# Altium PCB PCB1.PcbDoc
Units mm, origin at the board's own origin, x right, y up, seen from the top; angles counter-clockwise.
Board outline 319 x 41.5 mm, 4 copper layers (Top Layer, Mid Layer 1, Mid Layer 2, Bottom Layer), stack 1.57 mm thick; 48 components, 54 nets, 298 pads, 180 vias.
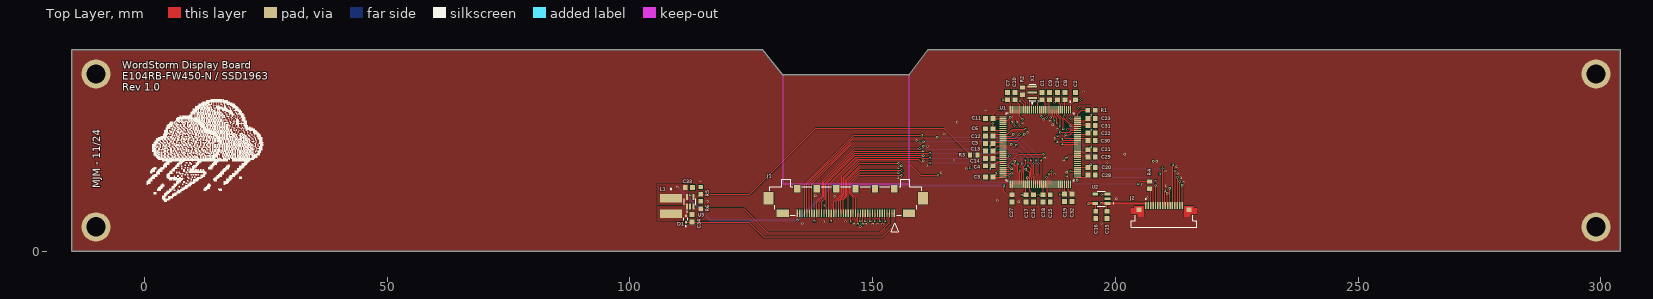
[diagram p0: Top Layer view]
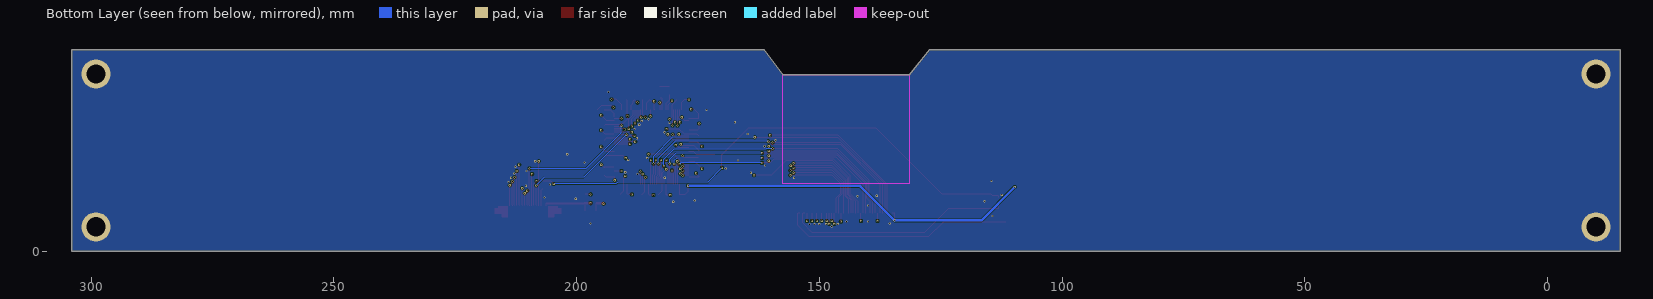
[diagram p1: Bottom Layer view, seen from below]
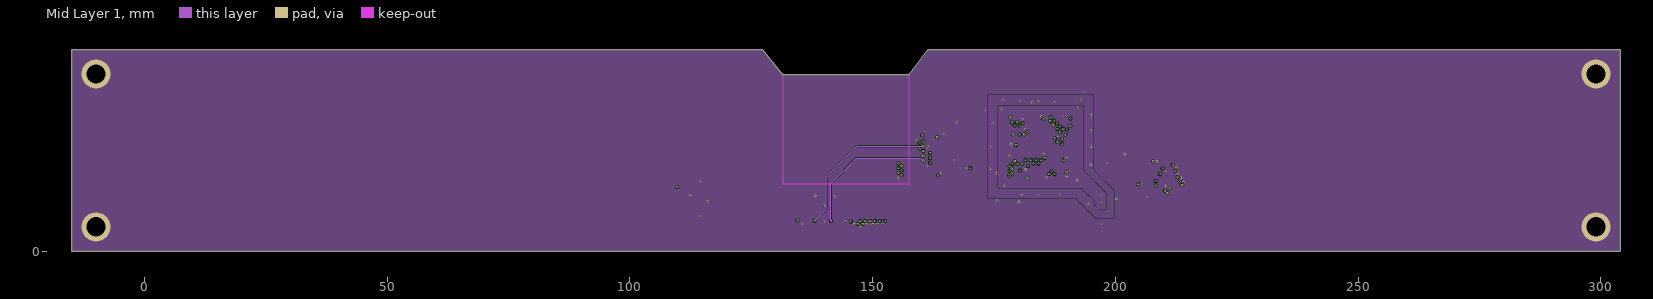
[diagram p2: Mid Layer 1]
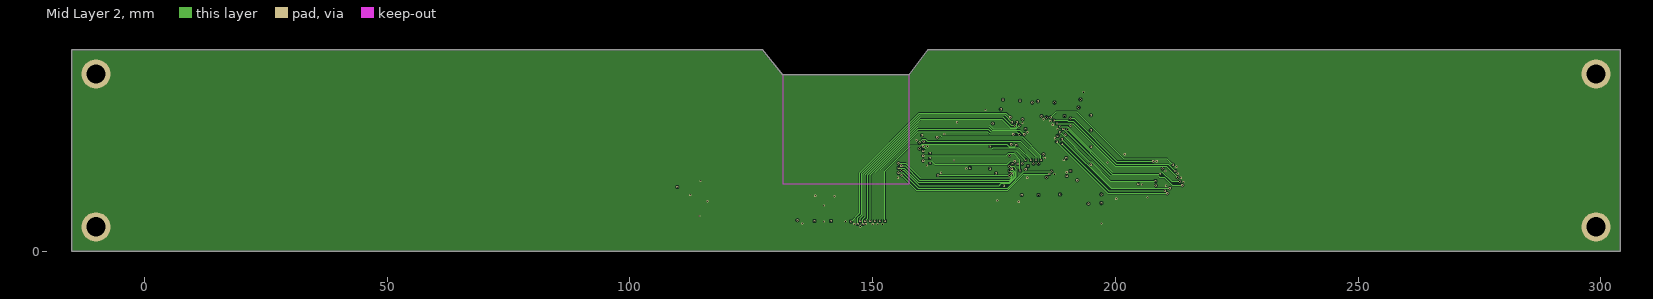
[diagram p3: Mid Layer 2]
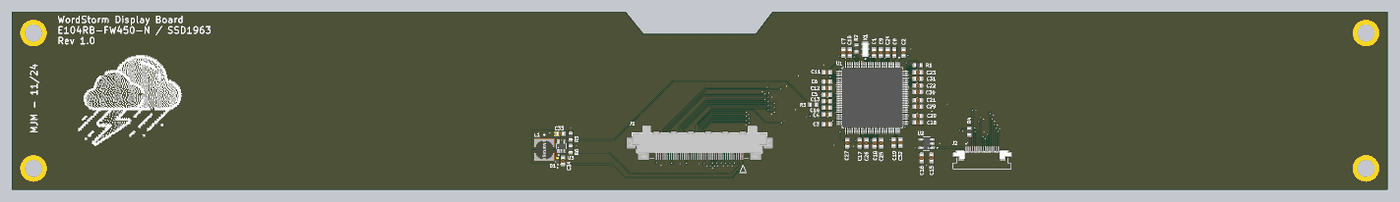
[diagram p4: 3D render of the assembled board from above, using the file's embedded part models]

## Layer stack, top to bottom
Top Solder: solder mask 0.0127, Solder Resist, Dk 3.8
Top Layer: signal copper 0.035
Dielectric 1: prepreg 0.1, 2313, Dk 4.05
Mid Layer 1: signal copper 0.0175
Core: core 1.265, FR-4, Dk 4.5
Mid Layer 2: signal copper 0.0175
Dielectric 2: prepreg 0.1, 2313, Dk 4.05
Bottom Layer: signal copper 0.035
Bottom Solder: solder mask 0.0127, Solder Resist, Dk 3.8

## Board outline
-15,0 -15,41.5 127.283,41.5 131.46,36.322 157.46,36.322 161.388,41.5 304,41.5 304,0

## Design rules (kind name [scope] priority, off if disabled: settings)
BoardOutlineClearance [All] p1: gap=0.2 ignorepadtopadclearanceinfootprint=FALSE
Clearance [All] p1: gap=0.102 ignorepadtopadclearanceinfootprint=FALSE except(0.127: Arc-Via Track-Via SMDPad-Via THPad-Via Via-Via Via-Fill Via-Poly Via-Region Via-Text; 0.25: Arc-Hole Track-Hole SMDPad-Hole THPad-Hole Via-Hole Fill-Hole Poly-Hole Region-Hole Text-Hole)
ComponentClearance [All] p1: gap=0.102 collisioncheckmode=3 verticalgap=0.102 showdistances=TRUE
DiffPairsRouting [All] p1: maxlimit=0.102 minlimit=0.102 mostfreqgap=0.102 toplayer_minwidth=0.102 toplayer_maxwidth=1816.048 toplayer_prefwidth=0.102 midlayer1_minwidth=0.102 midlayer1_maxwidth=1816.048 midlayer1_prefwidth=0.102 midlayer2_minwidth=0.102 midlayer2_maxwidth=1816.048 midlayer2_prefwidth=0.102 bottomlayer_minwidth=0.102 bottomlayer_maxwidth=1816.048 bottomlayer_prefwidth=0.102 maxuncoupledlength=12.7
Height [All] p1: minheight=0 maxheight=1816.048 prefheight=12.7
HoleSize [All] p1: absolutevalues=TRUE maxlimit=6.3 minlimit=0.2 maxpercent=80.000 minpercent=20.000
HoleToHoleClearance [All] p1: gap=0.25 allowstackedmicrovias=FALSE
MinimumAnnularRing [All] p1: minimumring=0.076
MinimumSolderMaskSliver [All] p1: minsoldermaskwidth=0
PlaneClearance [All] p1: clearance=0.102
PlaneConnect PlaneConnectPowerPads [InPadClass('PowerPads')] p1: planeconnectstyle=Direct reliefexpansion=0.508 reliefentries=4 reliefconductorwidth=0.254 reliefairgap=0.254
PlaneConnect [All] p2: pad.planeconnectstyle=Relief pad.reliefexpansion=0.3 pad.reliefentries=4 pad.reliefconductorwidth=0.102 pad.reliefairgap=0.102 via.planeconnectstyle=Direct via.reliefexpansion=0.3 via.reliefentries=4 via.reliefconductorwidth=0.127 via.reliefairgap=0.127
PolygonConnect PolygonConnect_9 [All vs IsNamedPolygon('GND_L04_P006')] p1: connectstyle=Direct reliefconductorwidth=0.254 reliefentries=4 polygonreliefangle="90 Angle" airgapwidth=0.254
PolygonConnect PolygonConnect_8 [All vs IsNamedPolygon('GND_L03_P007')] p2: connectstyle=Direct reliefconductorwidth=0.254 reliefentries=4 polygonreliefangle="90 Angle" airgapwidth=0.254
PolygonConnect PolygonConnect_7 [All vs IsNamedPolygon('GND_L02_P005')] p3: connectstyle=Direct reliefconductorwidth=0.254 reliefentries=4 polygonreliefangle="90 Angle" airgapwidth=0.254
PolygonConnect PolygonConnect_6 [All vs IsNamedPolygon('GND_L01_P012')] p4: connectstyle=Direct reliefconductorwidth=0.254 reliefentries=4 polygonreliefangle="90 Angle" airgapwidth=0.254
PolygonConnect PolygonConnect_5 [All vs IsNamedPolygon('GND_L01_P009')] p5: connectstyle=Direct reliefconductorwidth=0.254 reliefentries=4 polygonreliefangle="90 Angle" airgapwidth=0.254
PolygonConnect PolygonConnect_4 [All vs IsNamedPolygon('GND_L04_P010')] p6: connectstyle=Direct reliefconductorwidth=0.254 reliefentries=4 polygonreliefangle="90 Angle" airgapwidth=0.254
PolygonConnect PolygonConnect_3 [All vs IsNamedPolygon('GND_L04_P008')] p7: connectstyle=Direct reliefconductorwidth=0.254 reliefentries=4 polygonreliefangle="90 Angle" airgapwidth=0.254
PolygonConnect PolygonConnect_2 [All vs IsNamedPolygon('NETD1_2_L01_P000')] p8: connectstyle=Direct reliefconductorwidth=0.254 reliefentries=4 polygonreliefangle="90 Angle" airgapwidth=0.254
PolygonConnect PolygonConnect_1 [All vs IsNamedPolygon('+3.3_L01_P001')] p9: connectstyle=Direct reliefconductorwidth=0.254 reliefentries=4 polygonreliefangle="90 Angle" airgapwidth=0.254
PolygonConnect PolygonConnectPowerPads [All vs (InPadClass('PowerPads'))] p10: connectstyle=Direct reliefconductorwidth=0.254 reliefentries=4 polygonreliefangle="90 Angle" airgapwidth=0.254
PolygonConnect [All] p11: thpad.connectstyle=Relief thpad.reliefconductorwidth=0.152 thpad.reliefentries=4 thpad.polygonreliefangle="90 Angle" thpad.airgapwidth=0.152 smdpad.connectstyle=Relief smdpad.reliefconductorwidth=0.152 smdpad.reliefentries=4 smdpad.polygonreliefangle="90 Angle" smdpad.airgapwidth=0.152 via.connectstyle=Direct via.reliefconductorwidth=0.127 via.reliefentries=4 via.polygonreliefangle="90 Angle" via.airgapwidth=0.127
RoutingVias [All] p1: holewidth=0.3 width=0.45 viastyle="Through Hole" minholewidth=0.3 minwidth=0.45 maxholewidth=6.3 maxwidth=6.55
SilkToSilkClearance [All] p1: silktosilkclearance=0
SilkToSolderMaskClearance [IsPad] p1: minsilkscreentomaskgap=0.102 clearancetoexposedcopper=TRUE
SolderMaskExpansion [IsVia] p1: expansion=0.075 istentingtop=TRUE
SolderMaskExpansion SolderMaskExpansion_1 [All] p2: expansion=0.075 istentingtop=FALSE
SupplyNets "Schematic Supply Nets_3" [InNet('GND')] p1: voltage=0.000
SupplyNets "Schematic Supply Nets_1" [InNet('+1.2')] p2: voltage=0.000
SupplyNets "Schematic Supply Nets" [InNet('+3.3')] p3: voltage=0.000
Width [All] p1: maxlimit=1816.048 minlimit=0.102 preferedwidth=0.102
20 further rules are at their usual default settings.

## Classes and differential pairs
component class Designator: J2
net class R[0..7]: R0 R1 R2 R3 R4 R5 R6 R7
net class G[0..7]: G0 G1 G2 G3 G4 G5 G6 G7
net class D[0..7]: D0 D1 D2 D3 D4 D5 D6 D7
net class B[0..7]: B0 B1 B2 B3 B4 B5 B6 B7

## Components (designator, comment, footprint, x,y, rotation, side; value= is the part's Value field where it differs from the comment)
C1 "GRM188R72A104MA35J" 0603#1 184.919,31.943 r270 top value="0.1 µF"
C2 "GRM188R72A104MA35J" 0603#1 191.777,31.943 r270 top value="0.1 µF"
C3 "GRM188R72A104MA35J" 0603#1 173.997,15.306 r0 top value="0.1 µF"
C4 "GRM188R72A104MA35J" 0603#1 173.997,17.592 r0 top value="0.1 µF"
C5 "GRM188R72A104MA35J" 0603#1 173.997,22.164 r0 top value="0.1 µF"
C6 "GRM188R72A104MA35J" 0603#1 173.997,25.212 r0 top value="0.1 µF"
C7 "GRM188R72A104MA35J" 0603#1 177.807,31.943 r270 top value="0.1 µF"
C8 "GRM188R72A104MA35J" 0603#1 189.618,31.943 r270 top value="0.1 µF"
C9 "GRM188R72A104MA35J" 0603#1 186.443,31.943 r270 top value="0.1 µF"
C10 "GRM188R72A104MA35J" 0603#1 179.331,31.943 r270 top value="0.1 µF"
C11 "GRM188R72A104MA35J" 0603#1 173.997,27.371 r0 top value="0.1 µF"
C12 "GRM188R72A104MA35J" 0603#1 173.997,23.688 r0 top value="0.1 µF"
C13 "GRM188R72A104MA35J" 0603#1 173.997,20.64 r0 top value="0.1 µF"
C14 "GRM188R72A104MA35J" 0603#1 173.997,19.116 r0 top value="0.1 µF"
C15 "GRM188D71H105KE01J" 0603#1 198.232,7.458 r270 top value="1.0 µF"
C16 "GRM188D71H105KE01J" 0603#1 195.946,7.458 r270 top value="1.0 µF"
C17 "GRM188R72A104MA35J" 0603#1 181.617,10.861 r90 top value="0.1 µF"
C18 "GRM188R72A104MA35J" 0603#1 185.046,10.861 r90 top value="0.1 µF"
C19 "GRM188R72A104MA35J" 0603#1 189.491,10.988 r90 top value="0.1 µF"
C20 "GRM188R72A104MA35J" 0603#1 195.079,17.211 r180 top value="0.1 µF"
C21 "GRM188R72A104MA35J" 0603#1 195.079,20.894 r180 top value="0.1 µF"
C22 "GRM188R72A104MA35J" 0603#1 195.079,24.323 r180 top value="0.1 µF"
C23 "GRM188R72A104MA35J" 0603#1 195.079,27.371 r180 top value="0.1 µF"
C24 "GRM188R72A104MA35J" 0603#1 188.094,31.943 r270 top value="0.1 µF"
C25 "GRM188R72A104MA35J" 0603#1 186.57,10.861 r90 top value="0.1 µF"
C26 "GRM188R72A104MA35J" 0603#1 183.141,10.858 r90 top value="0.1 µF"
C27 "GRM188R72A104MA35J" 0603#1 178.696,10.861 r90 top value="0.1 µF"
C28 "GRM188R72A104MA35J" 0603#1 195.079,15.687 r180 top value="0.1 µF"
C29 "GRM188R72A104MA35J" 0603#1 195.076,19.37 r180 top value="0.1 µF"
C30 "GRM188R72A104MA35J" 0603#1 195.079,22.799 r180 top value="0.1 µF"
C31 "GRM188R72A104MA35J" 0603#1 195.079,25.847 r180 top value="0.1 µF"
C32 "GRM188R72A104MA35J" 0603#1 191.015,10.988 r90 top value="0.1 µF"
C33 "GRM188R6YA475KE15D" 0603#1 112.141,13.081 r180 top value="4.7 µF"
C34 "GRM188D71H105KE01J" 0603#1 112.776,6.757 r270 top value="1.0 µF"
D1 "NSR0240V2T1G" SOD523 111.506,6.63 r90 top
J1 "5039084120" 41POS 144.46,11.1 r180 top
J2 "SFV16R-1STBE1HLF" FFC16POS 210,7 r0 top
L1 "744773047" "4.50mm x 4.00mm" 108.458,9.297 r270 top value="4.7 µH"
R1 "RMCF0603FG10K0" 0603#2 195.079,29.022 r180 top value=10KΩ
R2 "RMCF0603FT120R" 0603#2 180.855,32.959 r90 top value=120Ω
R3 "RMCF0603ZT0R00" 0603#2 170.815,19.812 r0 top value=0Ω
R4 "RMCF0603ZT0R00" 0603#2 207.01,13.591 r270 top value=0Ω
R5 "RMCF0603FG10K0" 0603#2 114.554,12.446 r90 top value=10KΩ
R6 "RMCF0603FT2R55" 0603#2 114.554,9.525 r90 top value=2.55Ω
U1 "SSD1963QL9" PCBComponent_1 184.531,21.463 r270 top
U2 "TLV75512PDBVR" SOT-23-5 197.104,10.795 r180 top
U3 "TPS61169DCKR" SOT-353 112.395,10.186 r90 top
X1 "CSTNE10M0G550000R0" 3-SMD 182.887,32.705 r90 top value="10 MHz"

## Footprints (in the part's own frame and the unit in brackets; to place one, negate y for a bottom-side part, rotate by r counter-clockwise, add the part's x,y. Pads: shape width x height; smd on the part's side, far side on the other; paste and mask are expansions set on the pad)
3-SMD [mm]
  rect 0.4x1.9 smd: 1(-1.2,0) 2(0,0) 3(1.2,0)
  silkscreen extent -2.32,-0.65 1.72,0.65, body extent -1.6,-0.65 1.6,0.65, height 0.8
"4.50mm x 4.00mm" [mm]
  rect 1.75x4.5 smd: 1(-1.625,0) 2(1.625,0)
  silkscreen extent -3.62,-0.12 -3.38,0.13, body extent -2.24,-2 2.24,2, height 3.2
41POS [mm]
  rect 0.25x1.55 smd paste+0 mask+0.025: 1(-10,3.27) 2(-9.5,3.27) 3(-9,3.27) 4(-8.5,3.27) 5(-8,3.27) 6(-7.5,3.27) 7(-7,3.27) 8(-6.5,3.27) 9(-6,3.27) 10(-5.5,3.27) 11(-5,3.27) 12(-4.5,3.27) 13(-4,3.27) 14(-3.5,3.27) 15(-3,3.27) 16(-2.5,3.27) 17(-2,3.27) 18(-1.5,3.27) 19(-1,3.27) 20(-0.5,3.27) 21(0,3.27) 22(0.5,3.27) 23(1,3.27) 24(1.5,3.27) 25(2,3.27) 26(2.5,3.27) 27(3,3.27) 28(3.5,3.27) 29(4,3.27) 30(4.5,3.27) 31(5,3.27) 32(5.5,3.27) 33(6,3.27) 34(6.5,3.27) 35(7,3.27) 36(7.5,3.27) 37(8,3.27) 38(8.5,3.27) 39(9,3.27) 40(9.5,3.27) 41(10,3.27)
  rect 2.5x1.55 smd paste+0 mask+0.025: C1(-13,3.28) C2(13,3.28)
  rect 2.05x2.5 smd paste+0 mask+0.025: P1(-15.9,0.205) P2(15.9,0.205)
  rect 1.3x1.55 smd paste+0 mask+0.025: S1(-10,-1.8) S2(-6,-1.8) S3(-2,-1.8) S4(2,-1.8) S5(6,-1.8) S6(10,-1.8)
  silkscreen extent -15.65,-3.67 15.65,7.08, body extent -16.42,-3.7 16.43,3.65, height 3.73
0603#1 [mm]
  rect 1x1.02 smd: 1(-0.759,0) 2(0.759,0)
  body extent -0.8,-0.4 0.8,0.4, height 1
0603#2 [mm]
  rect 0.9x0.97 smd: 1(-0.76,0) 2(0.76,0)
  body extent -0.77,-0.4 0.77,0.4, height 0.55
FFC16POS [mm]
  rect 0.3x1.4 smd mask+0.05: 1(-3.75,2.4) 2(-3.25,2.4) 3(-2.75,2.4) 4(-2.25,2.4) 5(-1.75,2.4) 6(-1.25,2.4) 7(-0.75,2.4) 8(-0.25,2.4) 9(0.25,2.4) 10(0.75,2.4) 11(1.25,2.4) 12(1.75,2.4) 13(2.25,2.4) 14(2.75,2.4) 15(3.25,2.4) 16(3.75,2.4)
  rect 1x1 smd paste-1 mask+0: SH1(-5.12,1.53) SH2(5.12,1.53)
  Top Layer region: -4.2,0 -5.45,0 -5.45,0.7 -6.85,0.7 -6.85,1.8 -6.15,1.8 -6.15,2.3 -4.2,2.3
  Top Layer region: 6.15,1.8 6.85,1.8 6.85,0.7 5.45,0.7 5.45,0 4.2,0 4.2,2.3 6.15,2.3
  silkscreen extent -6.75,-2.1 6.75,3.85, body extent -6.75,-2.1 6.75,2.8, height 1.87
PCBComponent_1 [mm]
  rrect25% 1.47x0.24 smd: 1(-7.67,6.2) 2(-7.67,5.8) 3(-7.67,5.4) 4(-7.67,5) 5(-7.67,4.6) 6(-7.67,4.2) 7(-7.67,3.8) 8(-7.67,3.4) 9(-7.67,3) 10(-7.67,2.6) 11(-7.67,2.2) 12(-7.67,1.8) 13(-7.67,1.4) 14(-7.67,1) 15(-7.67,0.6) 16(-7.67,0.2) 17(-7.67,-0.2) 18(-7.67,-0.6) 19(-7.67,-1) 20(-7.67,-1.4) 21(-7.67,-1.8) 22(-7.67,-2.2) 23(-7.67,-2.6) 24(-7.67,-3) 25(-7.67,-3.4) 26(-7.67,-3.8) 27(-7.67,-4.2) 28(-7.67,-4.6) 29(-7.67,-5) 30(-7.67,-5.4) 31(-7.67,-5.8) 32(-7.67,-6.2) 65(7.67,-6.2) 66(7.67,-5.8) 67(7.67,-5.4) 68(7.67,-5) 69(7.67,-4.6) 70(7.67,-4.2) 71(7.67,-3.8) 72(7.67,-3.4) 73(7.67,-3) 74(7.67,-2.6) 75(7.67,-2.2) 76(7.67,-1.8) 77(7.67,-1.4) 78(7.67,-1) 79(7.67,-0.6) 80(7.67,-0.2) 81(7.67,0.2) 82(7.67,0.6) 83(7.67,1) 84(7.67,1.4) 85(7.67,1.8) 86(7.67,2.2) 87(7.67,2.6) 88(7.67,3) 89(7.67,3.4) 90(7.67,3.8) 91(7.67,4.2) 92(7.67,4.6) 93(7.67,5) 94(7.67,5.4) 95(7.67,5.8) 96(7.67,6.2)
  rrect25% 0.24x1.47 smd: 33(-6.2,-7.67) 34(-5.8,-7.67) 35(-5.4,-7.67) 36(-5,-7.67) 37(-4.6,-7.67) 38(-4.2,-7.67) 39(-3.8,-7.67) 40(-3.4,-7.67) 41(-3,-7.67) 42(-2.6,-7.67) 43(-2.2,-7.67) 44(-1.8,-7.67) 45(-1.4,-7.67) 46(-1,-7.67) 47(-0.6,-7.67) 48(-0.2,-7.67) 49(0.2,-7.67) 50(0.6,-7.67) 51(1,-7.67) 52(1.4,-7.67) 53(1.8,-7.67) 54(2.2,-7.67) 55(2.6,-7.67) 56(3,-7.67) 57(3.4,-7.67) 58(3.8,-7.67) 59(4.2,-7.67) 60(4.6,-7.67) 61(5,-7.67) 62(5.4,-7.67) 63(5.8,-7.67) 64(6.2,-7.67) 97(6.2,7.67) 98(5.8,7.67) 99(5.4,7.67) 100(5,7.67) 101(4.6,7.67) 102(4.2,7.67) 103(3.8,7.67) 104(3.4,7.67) 105(3,7.67) 106(2.6,7.67) 107(2.2,7.67) 108(1.8,7.67) 109(1.4,7.67) 110(1,7.67) 111(0.6,7.67) 112(0.2,7.67) 113(-0.2,7.67) 114(-0.6,7.67) 115(-1,7.67) 116(-1.4,7.67) 117(-1.8,7.67) 118(-2.2,7.67) 119(-2.6,7.67) 120(-3,7.67) 121(-3.4,7.67) 122(-3.8,7.67) 123(-4.2,7.67) 124(-4.6,7.67) 125(-5,7.67) 126(-5.4,7.67) 127(-5.8,7.67) 128(-6.2,7.67)
  silkscreen extent -9.44,-7 7,7, body extent -8,-8 8,8, height 1.6
SOD523 [mm]
  rect 0.5x0.4 smd: 1(-0.7,0) 2(0.7,0)
  silkscreen extent -1.58,-0.4 0.25,0.4, body extent -0.8,-0.4 0.8,0.4, height 0.7
SOT-23-5 [mm]
  rect 1.21x0.58 smd: 1(-1.255,0.95) 2(-1.255,0) 3(-1.255,-0.95) 4(1.255,-0.95) 5(1.255,0.95)
  silkscreen extent -2.6,-1.56 0.8,1.56, body extent -1.4,-1.45 1.4,1.45, height 1.45
SOT-353 [mm]
  rect 1.19x0.4 smd: 1(-0.96,0.65) 2(-0.96,0) 3(-0.96,-0.65) 4(0.96,-0.65) 5(0.96,0.65)
  silkscreen extent -2.2,-1.17 0.63,1.17, body extent -1.05,-1 1.05,1, height 1.1

## Part data
C1 C2 C3 C4 C5 C6 C7 C8 C9 C10 C11 C12 C13 C14 C17 C18 C19 C20 C21 C22 C23 C24 C25 C26 C27 C28 C29 C30 C31 C32: "0.1 µF ±20% 100V Ceramic Capacitor X7R 0603 (1608 Metric)", Case=0603, Temperature Coefficient=X7R, Tolerance=±20%, Voltage=100V
C15 C16 C34: "1 µF ±10% 50V Ceramic Capacitor X7T 0603 (1608 Metric)", Case=0603, Temperature Coefficient=X7T, Tolerance=±10%, Voltage=50V
C33: "4.7 µF ±10% 35V Ceramic Capacitor X5R 0603 (1608 Metric)", Case=0603, Temperature Coefficient=X5R, Tolerance=±10%, Voltage=35V
D1: "Diode 40 V 250mA Surface Mount SOD-523", Current=250mA, DC Reverse=40V
J1: "41 Position FFC Connector Contacts, Bottom 0.020\" (0.50mm) Surface Mount, Right Angle"
J2: "16 Position FFC, FPC Connector Contacts, Bottom 0.020\" (0.50mm) Surface Mount, Right Angle"
L1: "4.7 µH Unshielded Drum Core, Wirewound Inductor 1.82 A 110mOhm Max Nonstandard", Current=1.82A, DC Resistance=110mOhm, Frequency=50MHz
R1 R5: "10 kOhms ±1% 0.1W, 1/10W Chip Resistor 0603 (1608 Metric) Automotive AEC-Q200 Thick Film", Case=0603, Power=0.1W, Tolerance=1%
R2: "120 Ohms ±1% 0.1W, 1/10W Chip Resistor 0603 (1608 Metric) Automotive AEC-Q200 Thick Film", Case=0603, Power=0.1W, Tolerance=1%
R3 R4: "0 Ohms Jumper Chip Resistor 0603 (1608 Metric) Automotive AEC-Q200 Thick Film", Case=0603, Power=0, Tolerance=0
R6: "2.55 Ohms ±1% 0.1W, 1/10W Chip Resistor 0603 (1608 Metric) Automotive AEC-Q200 Thick Film", Case=0603, Power=0.1W, Tolerance=1%
U1: "LQFP-128(14x14) LCD Drivers ROHS"
U2: "Linear Voltage Regulator IC Positive Fixed 1 Output 500mA SOT-23-5"
U3: "LED Driver IC 1 Output DC DC Regulator Step-Up (Boost) PWM Dimming 1.8A (Switch) SC-70-5"
X1: "10 MHz Ceramic Resonator Built in Capacitor 33 pF ±0.2% 40 Ohms -40°C ~ 85°C Surface Mount"

## Free pads (board coordinates)
  round 6 hole 4: 5(-10,5) 5(-10,36.5) 5(299,5) 5(299,36.5)

## Via types
v1: diameter 0.46, hole 0.3, Top Layer to Bottom Layer, tented both sides, 180 vias

## Nets (pads, with @x,y where several pads share a name; then routed paths per layer and width w, separated by ;. In a path a pad name is that pad's centre, name@x,y a point inside that pad or via, vN(x,y) a via of type N, cw(c..) or ccw(c..) an arc to the next point about the centre after c; other vN are vias at no path point)
+1.2: C1.2 C2.2 C3.2 C4.2 C5.2 C6.2 C7.2 C16.1 C17.2 C18.2 C19.2 C20.2 C21.2 C22.2 C23.2 C24.2 U1.1 U1.6 U1.14 U1.18 U1.21 U1.25 U1.32 U1.40 U1.46 U1.56 U1.64 U1.73 U1.82 U1.93 U1.102 U1.110 U1.119 U1.126 U2.5 | length 56.5
  Top Layer w0.152: v1(174.154,16.98) 174.752,17.578 174.752,17.598 175.617,18.463 U1.56 ; v1(174.154,21.552) 174.756,22.154 C5.2 175.055,22.463 U1.46 ; v1(174.752,26.289) 174.756,26.285 C6.2 175.105,24.863 U1.40 ; C3.2 174.799,15.263 U1.64 ; C3.2@174.756,15.316 175.33,15.89 175.33,16.006 v1(175.387,16.063) ; v1(176.842,31.184) C7.2 177.817,31.184 178.331,30.67 U1.32 ; v1(180.34,30.988) 181.131,30.197 U1.25 ; v1(180.721,11.557) 181.554,11.557 C17.2 181.531,11.706 U1.73 ; U1.21 182.731,30.458 v1(182.88,30.607) ; U1.18 183.975,29.177 183.975,30.813 v1(184.023,30.861) 184.596,30.861 C1.2 184.929,31.184 185.531,30.582 U1.14 ; v1(184.15,11.557) 184.983,11.557 185.131,11.705 U1.82 ; v1(187.452,30.607) 187.507,30.607 188.084,31.184 C24.2 188.276,31.002 188.276,30.545 188.731,30.09 U1.6 ; v1(188.595,11.684) 189.428,11.684 189.531,11.787 U1.93 ; U1.1 190.731,30.148 191.767,31.184 C2.2 191.835,31.242 v1(192.786,31.242) ; U1.102 194.268,17.263 C20.2 194.32,17.221 v1(194.922,17.823) ; U1.110 193.896,20.463 194.32,20.887 194.32,20.904 194.907,21.491 v1(194.947,21.491) ; U1.119 194.06,24.063 C22.2 194.32,24.333 194.879,24.892 194.92,24.892 v1(194.947,24.92) ; U1.126 193.822,26.863 194.32,27.361 194.32,27.381 v1(194.945,28.006)
  Top Layer w0.254: U2.5 195.946,9.748 C16.1
  Top Layer w0.508: v1(194.437,9.779) 194.503,9.845 U2.5
+3.3: C8.2 C9.2 C10.2 C11.2 C12.2 C13.2 C14.2 C15.1 C25.2 C26.2 C27.2 C28.2 C29.2 C30.2 C31.2 C32.2 C33.2 J1.40 J1.41 J2.1 L1.1 R1.1 U1.4 U1.12 U1.16 U1.27 U1.34 U1.42 U1.48 U1.54 U1.58 U1.66 U1.75 U1.84 U1.95 U1.97 U1.100 U1.108 U1.117 U1.124 U2.1 U2.3 U3.5 | length 175.6
  Top Layer w0.152: v1@134.46,6.383 v1(134.493,6.35) ; C14.2 174.903,19.263 177.791,19.263 v1(178.181,19.653) ; C13.2 174.756,20.65 175.769,21.663 U1.48 178.19,21.663 v1(178.562,22.035) ; C12.2 175.131,24.063 U1.42 177.733,24.063 178.816,25.146 v1(181.483,25.146) ; v1(176.403,29.21) 175.768,29.21 174.879,28.321 174.879,27.278 174.864,27.263 U1.34 ; U1.58 176.905,17.707 177.725,17.707 177.986,17.968 177.988,17.968 179.959,19.939 v1(185.166,19.939) ; v1(177.038,13.462) 177.038,12.319 177.737,11.62 C27.2 178.731,11.655 U1.66 ; C10.2 179.341,31.184 180.331,30.194 U1.27 180.331,27.695 v1(180.848,27.178) ; v1(181.546,16.891) 182.331,16.106 182.331,12.417 183.131,11.617 C26.2 ; U1.16 184.731,27.867 v1(184.785,27.813) ; v1(185.801,15.24) 185.801,15.159 185.931,15.029 185.931,12.249 186.56,11.62 C25.2 ; v1(185.801,27.559) 186.331,28.089 U1.12 186.331,31.072 C9.2 ; v1(188.087,23.749) 189.312,23.749 189.798,23.263 U1.117 193.866,23.263 194.32,22.809 C30.2 ; C8.2 189.531,31.097 U1.4 189.519,29.121 189.519,27.848 189.484,27.813 189.484,27.305 190.5,26.289 190.948,26.289 191.174,26.063 U1.124 194.104,26.063 C31.2 ; v1(189.865,19.177) 190.351,19.663 U1.108 194.024,19.663 C29.2 ; v1(189.992,15.494) 190.331,15.155 190.331,12.421 191.005,11.747 C32.2 ; v1(190.754,16.51) 190.801,16.463 U1.100 ; v1(192.151,14.605) 192.151,15.219 192.195,15.263 U1.97 193.896,15.263 C28.2 ; v1(192.405,29.591) 192.786,29.972 194.889,29.972 195.43,29.431 195.465,29.431 195.839,29.057 R1.1 ; v1(197.104,11.684) 197.165,11.745 U2.3 ; U2.1@198.232,9.718 U2.1 ; J2.1@206.176,9.845 206.25,9.771 J2.1
  Top Layer w0.203: J1.41 J1.40
  Top Layer w0.254: v1@134.46,6.383 J1.41 ; C15.1 U2.1@198.232,9.718
  Top Layer w0.381: U2.1 J2.1@206.176,9.845
  Top Layer w0.508: v1(197.104,9.906) 197.165,9.845 U2.1
  Bottom Layer w0.508: v1(109.728,13.208) 116.586,6.35 v1(134.493,6.35) 141.605,13.462 v1(177.038,13.462)
  other v1: 189.508,27.837
B0: J1.38 U1.81 | length 66.5
  Top Layer w0.152: J1.38 135.96,13.786 146.05,23.876 v1(160.147,23.876) ; v1(184.658,18.796) 184.694,18.76 184.694,13.829 U1.81
  Mid Layer 2 w0.152: v1(160.147,23.876) 160.206,23.935 160.386,23.935 160.39,23.939 163.894,23.939 164.274,23.559 180.784,23.559 184.658,19.685 v1(184.658,18.796)
B1: J1.37 U1.80 | length 65.1
  Top Layer w0.152: J1.37 136.46,13.778 146.082,23.4 163.241,23.4 v1(163.295,23.453) ; v1(184.15,18.034) 184.15,15.875 184.331,15.694 U1.80
  Bottom Layer w0.152: v1(163.295,23.453) 180.255,23.453 184.15,19.558 v1(184.15,18.034)
B2: J1.36 U1.79 | length 63.8
  Top Layer w0.152: J1.36 136.96,13.77 145.557,22.367 v1(159.622,22.367) ; v1(183.642,18.796) 183.674,18.764 183.674,15.843 183.931,15.586 U1.79
  Mid Layer 2 w0.152: v1(159.622,22.367) 159.622,22.437 160.267,23.082 160.814,23.082 161.258,22.638 180.435,22.638 183.642,19.431 v1(183.642,18.796)
B3: J1.35 U1.78 | length 62.2
  Top Layer w0.152: J1.35 137.46,13.762 145.574,21.876 159.442,21.876 159.444,21.873 159.802,21.873 160.528,22.599 v1(160.528,22.606) ; v1(183.134,18.034) 183.185,17.983 183.185,15.824 183.531,15.478 U1.78
  Bottom Layer w0.152: v1(160.528,22.606) 179.705,22.606 183.134,19.177 v1(183.134,18.034)
B4: J1.34 U1.77 | length 63.1
  Top Layer w0.152: J1.34 137.981,7.809 137.981,6.225 v1(138.002,6.204) ; v1(182.626,18.796) 182.626,17.78 182.839,17.567 182.839,15.535 183.131,15.243 U1.77
  Mid Layer 1 w0.152: v1(138.002,6.204) 140.462,8.664 140.462,15.367 146.685,21.59 v1(160.401,21.59)
  Mid Layer 2 w0.152: v1(160.401,21.59) 160.915,21.076 174.619,21.076 174.847,21.304 180.118,21.304 v1(182.626,18.796)
B5: J1.33 U1.76 | length 58.6
  Top Layer w0.152: J1.33 138.46,10.19 139.698,11.428 139.698,14.603 146.177,21.082 v1(159.639,21.082) ; v1(181.991,17.526) 182.585,16.932 182.585,15.281 182.731,15.135 U1.76
  Bottom Layer w0.152: v1(159.639,21.082) 159.671,21.114 160.877,21.114 161.036,20.955 179.997,20.955 181.991,18.961 v1(181.991,17.526)
B6: J1.32 U1.72 | length 57.1
  Top Layer w0.152: J1.32 138.96,10.182 139.952,11.174 139.952,14.349 146.209,20.606 160.369,20.606 v1(160.401,20.638) ; U1.72 181.131,16.633 181.07,16.694 181.07,17.494 181.483,17.907 v1(181.483,18.796)
  Mid Layer 2 w0.152: v1(160.401,20.638) 160.433,20.669 179.591,20.669 181.153,19.107 181.464,18.796 v1(181.483,18.796)
B7: J1.31 U1.71 | length 55.5
  Top Layer w0.152: J1.31 139.46,10.174 140.206,10.92 140.206,14.095 146.272,20.161 161.766,20.161 v1(161.798,20.193) ; U1.71 180.731,16.129 180.816,16.214 v1(180.816,18.034)
  Bottom Layer w0.152: v1(161.798,20.193) 179.6,20.193 180.848,18.945 180.848,18.066 v1(180.816,18.034)
D0: J2.16 U1.7 | length 37.8
  Top Layer w0.152: U1.7 188.331,28.077 189.23,27.178 v1(189.23,25.178) ; v1(213.741,13.589) 213.745,13.585 213.745,9.405 J2.16
  Mid Layer 2 w0.152: v1(189.23,25.178) 198.914,15.494 208.788,15.494 209.042,15.24 210.058,15.24 211.709,13.589 v1(213.741,13.589)
D1: J2.15 U1.8 | length 38.1
  Top Layer w0.152: U1.8 187.931,27.969 188.595,27.305 v1(188.595,25.654) ; J2.15 213.241,9.409 213.241,14.328 v1(213.265,14.351)
  Mid Layer 2 w0.152: v1(188.595,25.654) 190.1,25.654 190.216,25.538 190.232,25.538 190.511,25.259 190.511,25.243 199.371,16.383 209.55,16.383 211.582,14.351 v1(213.265,14.351)
D2: J2.14 U1.9 | length 38.3
  Top Layer w0.152: U1.9 187.531,27.831 187.96,27.402 v1(187.96,26.289) ; J2.14 212.788,9.438 v1(212.788,15.24)
  Mid Layer 2 w0.152: v1(187.96,26.289) 191.171,26.289 199.966,17.494 210.472,17.494 212.726,15.24 v1(212.788,15.24)
D3: J2.13 U1.10 | length 38.7
  Top Layer w0.152: U1.10 187.131,27.753 187.325,27.559 v1(187.325,26.924) ; J2.13 212.312,9.462 v1(212.312,16.51)
  Mid Layer 2 w0.152: v1(187.325,26.924) 190.119,26.924 190.246,26.797 191.262,26.797 200.152,17.907 210.915,17.907 v1(212.312,16.51)
D4: J2.12 U1.11 | length 40.2
  Top Layer w0.152: v1(186.655,27.559) 186.655,27.64 186.731,27.716 U1.11 ; J2.12 211.824,9.474 211.824,10.101 211.836,10.113 v1(211.836,17.78)
  Mid Layer 2 w0.152: v1(186.655,27.559) 187.798,28.702 192.024,28.702 201.676,19.05 210.566,19.05 v1(211.836,17.78)
D5: J2.11 U1.116 | length 33.3
  Top Layer w0.152: v1(188.976,23.05) 189.057,23.05 189.244,22.863 U1.116 ; v1(211.201,12.954) 211.225,12.93 211.225,9.425 J2.11
  Mid Layer 2 w0.152: v1(188.976,23.05) 199.104,12.922 211.169,12.922 v1(211.201,12.954)
D6: J2.10 U1.115 | length 34.1
  Top Layer w0.152: v1(187.941,22.526) 187.989,22.574 189.173,22.574 189.284,22.463 U1.115 ; v1(210.693,11.938) 210.721,11.91 210.721,9.429 J2.10
  Mid Layer 2 w0.152: v1(187.941,22.526) 187.941,22.46 198.463,11.938 v1(210.693,11.938)
D7: J2.9 U1.114 | length 31.5
  Top Layer w0.152: v1(188.976,22.098) 189.011,22.063 U1.114 ; v1(210.185,12.446) 210.185,9.465 J2.9
  Mid Layer 2 w0.152: v1(188.976,22.098) 198.628,12.446 v1(210.185,12.446)
G0: J1.29 U1.70 | length 54.2
  Top Layer w0.152: J1.29 140.46,13.841 146.336,19.717 160.156,19.717 160.168,19.705 160.341,19.705 v1(160.399,19.647) ; U1.70 180.331,14.846 180.34,14.855 v1(180.34,16.637)
  Mid Layer 2 w0.152: v1(160.399,19.647) 177.476,19.647 177.99,20.161 179.024,20.161 180.34,18.845 v1(180.34,16.637)
G1: J1.28 U1.69 | length 52.4
  Top Layer w0.152: J1.28 140.96,13.833 146.463,19.336 159.861,19.336 160.074,19.123 161.75,19.123 v1(161.798,19.17) ; v1(179.864,17.954) 179.864,16.143 179.931,16.076 U1.69
  Bottom Layer w0.152: v1(161.798,19.17) 179.342,19.17 179.833,18.679 179.833,17.985 v1(179.864,17.954)
G2: J1.27 U1.68 | length 55.1
  Top Layer w0.152: v1(141.398,6.204) 141.429,6.235 141.429,7.799 J1.27 ; v1(179.239,18.542) 179.296,18.485 179.296,17.808 179.531,17.573 U1.68
  Mid Layer 1 w0.152: v1(141.398,6.204) 141.398,13.89 146.685,19.177 159.861,19.177 v1(160.401,18.637)
  Mid Layer 2 w0.152: v1(160.401,18.637) 162.084,18.637 162.814,17.907 177.673,17.907 178.403,18.637 179.06,18.637 179.156,18.542 v1(179.239,18.542)
G3: J1.26 U1.67 | length 49.6
  Top Layer w0.152: J1.26 141.96,10.134 143.637,11.811 143.637,15.494 147.066,18.923 159.385,18.923 160.147,18.161 v1(161.798,18.161) ; v1(178.82,17.939) 178.82,17.925 179.131,17.614 U1.67
  Bottom Layer w0.152: v1(161.798,18.161) 178.514,18.161 178.736,17.939 v1(178.82,17.939)
G4: J1.25 U1.63 | length 46.1
  Top Layer w0.152: J1.25 142.46,10.253 143.891,11.684 143.891,15.24 147.225,18.574 156.94,18.574 159.893,15.621 v1(163.449,15.621) ; U1.63 177.96,15.663 178.037,15.587 v1(178.117,15.587)
  Mid Layer 2 w0.152: v1(163.449,15.621) 163.483,15.587 v1(178.117,15.587)
G5: J1.24 U1.62 | length 47.2
  Top Layer w0.152: J1.24 142.96,10.394 144.145,11.579 144.145,14.986 147.257,18.098 v1(155.321,18.098) ; U1.62 178.446,16.063 178.455,16.054 178.468,16.054 178.55,15.973 v1(178.63,15.973)
  Mid Layer 2 w0.152: v1(155.321,18.098) 156.781,18.098 159.796,15.083 178.316,15.083 178.63,15.397 v1(178.63,15.973)
G6: J1.23 U1.61 | length 47.9
  Top Layer w0.152: J1.23 143.46,10.513 144.399,11.452 144.399,14.732 147.288,17.621 155.822,17.621 v1(155.873,17.57) ; U1.61 176.899,16.501 178.142,16.501 v1(178.181,16.539)
  Mid Layer 2 w0.152: v1(155.873,17.57) 156.674,17.57 159.639,14.605 178.198,14.605 179.106,15.514 179.106,16.17 178.772,16.504 178.215,16.504 v1(178.181,16.539)
G7: J1.22 U1.60 | length 48.2
  Top Layer w0.152: J1.22 143.96,10.61 144.653,11.303 144.653,14.478 147.352,17.177 155.289,17.177 v1(155.321,17.145) ; U1.60 177.825,16.863 177.977,17.015 178.62,17.015 v1(178.655,16.981)
  Mid Layer 2 w0.152: v1(155.321,17.145) 155.372,17.094 156.515,17.094 159.417,14.192 178.144,14.192 179.36,15.408 179.36,16.275 v1(178.655,16.981)
GND: C1.1 C2.1 C3.1 C4.1 C5.1 C6.1 C7.1 C8.1 C9.1 C10.1 C11.1 C12.1 C13.1 C14.1 C15.2 C16.2 C17.1 C18.1 C19.1 C20.1 C21.1 C22.1 C23.1 C24.1 C25.1 C26.1 C27.1 C28.1 C29.1 C30.1 C31.1 C32.1 C33.1 C34.1 J1.6 J1.8 J1.10 J1.12 J1.21 J1.30 J1.39 J2.2 pad.5 R5.2 R6.2 U1.2 U1.3 U1.5 U1.13 U1.15 U1.17 U1.19 U1.20 U1.23 U1.26 U1.33 U1.41 U1.47 U1.55 U1.57 U1.65 U1.74 U1.83 U1.94 U1.96 U1.101 U1.109 U1.118 U1.125 U2.2 U3.2 X1.2 | length 1.4
  Top Layer w0.152: v1(181.855,15.113) 181.855,15.032 181.931,14.956 U1.74
  other v1: 147.447,5.08 146.177,5.588 148.59,5.588 149.987,5.588 151.003,5.588 152.019,5.588 135.509,5.715 197.104,5.715 139.954,6.096 144.399,6.096 114.3,7.239 139.954,9.398 180.086,10.16 115.951,10.287 175.641,10.414 200.152,10.795 206.629,11.049 142.113,11.303 138.176,11.43 112.395,11.591 210.439,13.462 205.486,13.716 213.995,14.224 114.554,14.478 155.194,15.113 213.487,15.113 187.452,15.875 212.852,16.002 164.084,16.129 189.992,16.256 210.312,16.51 169.291,17.018 212.598,17.399 161.163,17.653 198.374,18.288 208.534,18.542 166.751,18.669 189.357,18.796 185.42,19.177 201.93,19.939 161.29,21.59 159.004,22.86 187.579,23.241 164.719,24.13 181.864,24.511 188.087,25.146 187.071,26.035 180.848,26.416 167.386,26.543 186.563,26.797 185.166,27.178 173.228,29.083 193.421,32.766
LEDA: C34.2 D1.1 J1.1 J1.2 | length 48.2
  Top Layer w0.254: D1.1 112.708,5.93 C34.2 124.431,5.998 127.508,2.921 152.019,2.921 154.46,5.362 J1.1 J1.2
LEDK: J1.3 J1.4 R6.1 U3.3 | length 46.2
  Top Layer w0.254: U3.3 113.045,8.889 113.169,8.765 R6.1 123.442,8.765 128.397,3.81 151.416,3.81 153.46,5.854 J1.3 J1.4
LEDON: R3.1 R4.1 R5.1 U3.4 | length 106.5
  Top Layer w0.152: v1(204.724,13.843) 205.232,14.351 R4.1
  Top Layer w0.203: U3.4 113.045,11.332 113.143,11.43 114.298,11.43 R5.1 124.716,11.686 138.303,25.273 164.594,25.273 169.646,20.221 169.681,20.221 170.055,19.847 R3.1 170.055,17.147 v1(170.053,17.145)
  Bottom Layer w0.203: v1(170.053,17.145) 172.974,14.224 191.516,14.224 191.897,13.843 v1(204.724,13.843)
NetD1_2: D1.2 L1.2 U3.1
NetJ1_5: J1.5 U1.49 | length 44.6
  Top Layer w0.152: J1.5 152.493,7.796 152.493,6.257 v1(152.527,6.223) ; U1.49 178.997,21.263 v1(179.578,21.844)
  Mid Layer 2 w0.152: v1(152.527,6.223) 152.527,16.51 157.734,21.717 159.855,21.717 160.204,22.066 177.578,22.066 178.086,21.558 179.222,21.558 179.508,21.844 v1(179.578,21.844)
NetJ1_7: J1.7 U1.43 | length 45.3
  Top Layer w0.152: J1.7 151.486,7.805 151.486,6.248 v1(151.511,6.223) ; U1.43 176.904,23.706 178.551,23.706 v1(178.931,24.086)
  Mid Layer 2 w0.152: v1(151.511,6.223) 151.511,16.764 159.385,24.638 173.622,24.638 174.117,24.143 178.874,24.143 v1(178.931,24.086)
NetJ1_9: J1.9 U1.44 | length 49.2
  Top Layer w0.152: J1.9 150.477,7.813 150.477,6.241 v1(150.495,6.223) ; U1.44 179.359,23.263 180.131,24.035 v1(180.211,24.035)
  Mid Layer 2 w0.152: v1(150.495,6.223) 150.495,16.256 159.385,25.146 173.768,25.146 174.276,24.638 179.608,24.638 v1(180.211,24.035)
NetJ1_11: J1.11 U1.45 | length 52.5
  Top Layer w0.152: J1.11 149.47,7.82 149.47,6.232 v1(149.479,6.223) ; U1.45 180.025,22.863 v1(181.229,24.067)
  Mid Layer 2 w0.152: v1(149.479,6.223) 149.479,15.748 159.385,25.654 173.863,25.654 174.593,24.924 180.291,24.924 181.148,24.067 v1(181.229,24.067)
NetJ2_3: J2.3 R4.2 | length 3.5
  Top Layer w0.152: R4.2 207.25,12.591 J2.3
NetJ2_4: J2.4 U1.127 | length 31.3
  Top Layer w0.152: v1(190.754,27.305) 190.796,27.263 U1.127 ; J2.4 207.761,9.411 207.761,18.531 v1(207.772,18.542)
  Mid Layer 2 w0.152: v1(190.754,27.305) 190.786,27.337 191.484,27.337 200.279,18.542 v1(207.772,18.542)
NetJ2_5: J2.5 U1.120 | length 29.7
  Top Layer w0.152: v1(189.735,24) 190.692,24 191.155,24.463 U1.120 ; J2.5 208.286,9.436 208.286,13.506 v1(208.321,13.541)
  Bottom Layer w0.152: v1(189.735,24) 189.777,24 198.537,15.24 206.623,15.24 v1(208.321,13.541)
NetJ2_6: J2.6 U1.121 | length 32.9
  Top Layer w0.152: v1(188.595,24.511) 190.5,24.511 190.852,24.863 U1.121 ; v1(208.248,14.439) 208.798,13.89 208.798,9.448 J2.6
  Mid Layer 2 w0.152: v1(188.595,24.511) 188.595,24.466 194.646,18.415 195.003,18.415 198.979,14.439 v1(208.248,14.439)
NetJ2_7: J2.7 U1.122 | length 31.7
  Top Layer w0.152: v1@190.043,25.07 190.08,25.07 190.273,25.263 U1.122 ; v1(209.169,15.875) 209.226,15.818 209.226,15.661 209.25,15.637 J2.7
  Mid Layer 2 w0.152: v1(190.035,25.062) 190.092,25.005 190.26,25.005 199.39,15.875 v1(209.169,15.875)
NetJ2_8: J2.8 U1.123 | length 32.6
  Top Layer w0.152: v1(190.751,25.813) 190.831,25.813 190.981,25.663 U1.123 ; v1(209.677,17.018) 209.709,16.986 209.709,9.441 J2.8
  Bottom Layer w0.152: v1(190.751,25.813) 190.751,24.387 198.12,17.018 v1(209.677,17.018)
NetR1_2: R1.2 U1.128 | length 3.1
  Top Layer w0.152: U1.128 192.201,28.303 192.92,29.022 R1.2
NetR2_2: R2.2 X1.3 | length 2.1
  Top Layer w0.152: R2.2 181.041,33.905 X1.3
NetR3_2: R3.2 U1.51 | length 5.6
  Top Layer w0.152: R3.2 175.26,19.812 175.911,20.463 U1.51
R0: J1.20 U1.59 | length 48.8
  Top Layer w0.152: J1.20 144.96,14.277 147.352,16.669 155.905,16.669 v1(155.956,16.618) ; U1.59 177.9,17.263 178.128,17.492 v1(178.183,17.492)
  Mid Layer 2 w0.152: v1(155.956,16.618) 156.421,16.618 159.577,13.462 176.054,13.462 176.53,13.938 178.249,13.938 179.616,15.305 179.616,16.853 179.006,17.463 178.212,17.463 v1(178.183,17.492)
R1: J1.19 U1.35 | length 50.8
  Top Layer w0.152: J1.19 145.501,7.789 145.501,6.137 v1(145.542,6.096) ; U1.35 176.873,26.875 177.705,26.875 178.327,27.498 v1(178.327,27.578)
  Mid Layer 2 w0.152: v1(145.542,6.096) 147.32,7.874 147.32,16.129 159.639,28.448 177.457,28.448 v1(178.327,27.578)
R2: J1.18 U1.86 | length 54.3
  Top Layer w0.152: J1.18 145.96,11.139 145.288,11.811 145.288,14.097 147.352,16.161 155.289,16.161 v1(155.321,16.129) ; U1.86 186.731,15.267 186.852,15.387 186.852,16.348 v1(186.817,16.383)
  Mid Layer 2 w0.152: v1(155.321,16.129) 156.21,16.129 159.353,12.986 177.773,12.986 181.155,16.368 186.802,16.368 v1(186.817,16.383)
R3: J1.17 U1.85 | length 52.7
  Top Layer w0.152: J1.17 146.46,11.02 145.542,11.938 145.542,13.843 147.352,15.653 155.924,15.653 v1(155.956,15.621) ; U1.85 186.353,13.815 186.353,15.87 v1(186.375,15.892)
  Mid Layer 2 w0.152: v1(155.956,15.621) 159.004,12.573 177.8,12.573 181.119,15.892 v1(186.375,15.892)
R4: J1.16 U1.31 | length 52.3
  Top Layer w0.152: v1(146.939,5.588) 146.95,5.599 146.95,7.819 J1.16 ; v1(178.689,26.543) 178.71,26.564 178.71,27.21 178.803,27.303 178.803,27.775 178.71,27.869 178.71,29.112 U1.31
  Mid Layer 2 w0.152: v1(146.939,5.588) 146.939,6.858 147.701,7.62 147.701,16.002 159.766,28.067 177.165,28.067 v1(178.689,26.543)
R5: J1.15 U1.30 | length 51.5
  Top Layer w0.152: v1(147.447,6.223) 147.453,6.229 147.453,7.823 J1.15 ; U1.30 179.131,26.99 179.197,26.924 v1(179.197,25.908)
  Mid Layer 2 w0.152: v1(147.447,6.223) 147.447,6.731 148.082,7.366 148.082,15.875 159.893,27.686 176.784,27.686 178.562,25.908 v1(179.197,25.908)
R6: J1.14 U1.29 | length 52.9
  Top Layer w0.152: v1(147.955,5.588) 147.957,5.59 147.957,7.827 J1.14 ; U1.29 179.531,27.098 179.705,26.924 v1(179.705,26.543)
  Mid Layer 2 w0.152: v1(147.955,5.588) 147.955,6.604 148.463,7.112 148.463,15.748 159.893,27.178 176.562,27.178 178.308,25.432 179.422,25.432 179.705,25.715 v1(179.705,26.543)
R7: J1.13 U1.28 | length 50.9
  Top Layer w0.152: J1.13 148.461,7.829 148.461,6.225 v1(148.463,6.223) ; U1.28 179.931,27.206 180.213,26.924 v1(180.213,25.908)
  Mid Layer 2 w0.152: v1(148.463,6.223) 148.971,6.731 148.971,15.748 159.258,26.035 174.022,26.035 174.879,25.178 179.527,25.178 180.213,25.864 v1(180.213,25.908)
XIN: U1.22 X1.1 | length 2.9
  Top Layer w0.152: U1.22 182.331,31.381 182.455,31.505 X1.1
XOUT: R2.1 U1.24 | length 3.3
  Top Layer w0.152: R2.1 180.855,31.181 181.531,30.505 U1.24
pads on no net: J1.C1 J1.C2 J1.P1 J1.P2 J1.S1 J1.S2 J1.S3 J1.S4 J1.S5 J1.S6 J2.SH1 J2.SH2 U1.36 U1.37 U1.38 U1.39 U1.50 U1.52 U1.53 U1.87 U1.88 U1.89 U1.90 U1.91 U1.92 U1.98 U1.99 U1.103 U1.104 U1.105 U1.106 U1.107 U1.111 U1.112 U1.113 U2.4

## Polygon pours and split planes (outlines as drawn)
GND on Top Layer "GND_L01_P012" (solid, pour order 12): 304.038,0 288.544,0 288.544,41.529 304.038,41.529
GND on Top Layer "GND_L01_P011" (solid, remove dead copper, pour order 11): 0,0 0,41.529 127.254,41.529 130.209,37.873 131.445,36.322 157.48,36.322 159.662,39.225 161.417,41.529 288.92,41.529 288.92,0
GND on Top Layer "GND_L01_P009" (solid, pour order 9): -14.986,41.529 0.508,41.529 0.508,0 -14.986,0
+3.3 on Top Layer "+3.3_L01_P001" (solid, pour order 1): 105.664,9.551 110.744,9.551 111.379,10.186 112.014,10.186 112.014,11.964 112.014,13.869 105.664,13.869
NetD1_2 on Top Layer "NETD1_2_L01_P000" (solid, pour order 0): 110.744,9.297 105.664,9.297 105.664,6.249 110.871,6.249 111.252,6.63 112.014,6.63 112.014,9.932 111.379,9.932
+1.2 on Mid Layer 1 "+1.2_L02_P004" (solid, pour order 4): 195.453,32.131 195.453,16.637 199.644,12.446 199.644,6.858 195.961,6.858 191.897,10.922 173.736,10.922 173.736,32.131
+3.3 on Mid Layer 1 "+3.3_L02_P003" (solid, pour order 3): 175.895,29.972 193.294,29.972 193.294,16.637 197.993,11.938 197.993,11.684 197.993,8.763 196.596,8.763 195.707,9.652 195.707,10.414 194.183,11.938 193.04,13.081 175.895,13.081
GND on Mid Layer 1 "GND_L02_P005" (solid, remove dead copper, pour order 5): -14.986,0 -14.986,41.529 127.254,41.529 130.209,37.873 131.445,36.322 157.48,36.322 159.662,39.225 161.417,41.529 304.038,41.529 304.038,0
GND on Bottom Layer "GND_L04_P006" (solid, remove dead copper, pour order 6): -15,0 -15,41.529 127.254,41.529 130.209,37.873 131.445,36.322 157.48,36.322 159.662,39.225 161.417,41.529 304,41.529 304,0
GND on Mid Layer 2 "GND_L03_P007" (solid, remove dead copper, pour order 7): -14.986,0 -14.986,41.529 127.254,41.529 130.209,37.873 131.445,36.322 157.48,36.322 159.662,39.225 161.417,41.529 304.038,41.529 304.038,0

## Keep-outs
Keep-Out Layer:
  rectangle: 131.445,13.843 157.48,36.322

## Silkscreen, mask and mechanical layers (free items; w line width, h text height)
Top Overlay:
  drawing of 359 lines, arcs and shapes, not listed
  text "WordStorm Display Board / E104RB-FW450-N / SSD1963 / Rev 1.0" at -4.572,33.02 h1.52
  text "MJM - 11/24" at -9.144,12.954 h1.52 r90
Mechanical 1:
  the board outline again, w0.254